# EAGLE board xkid_sensor_0.3 (EAGLE 7.1.0)
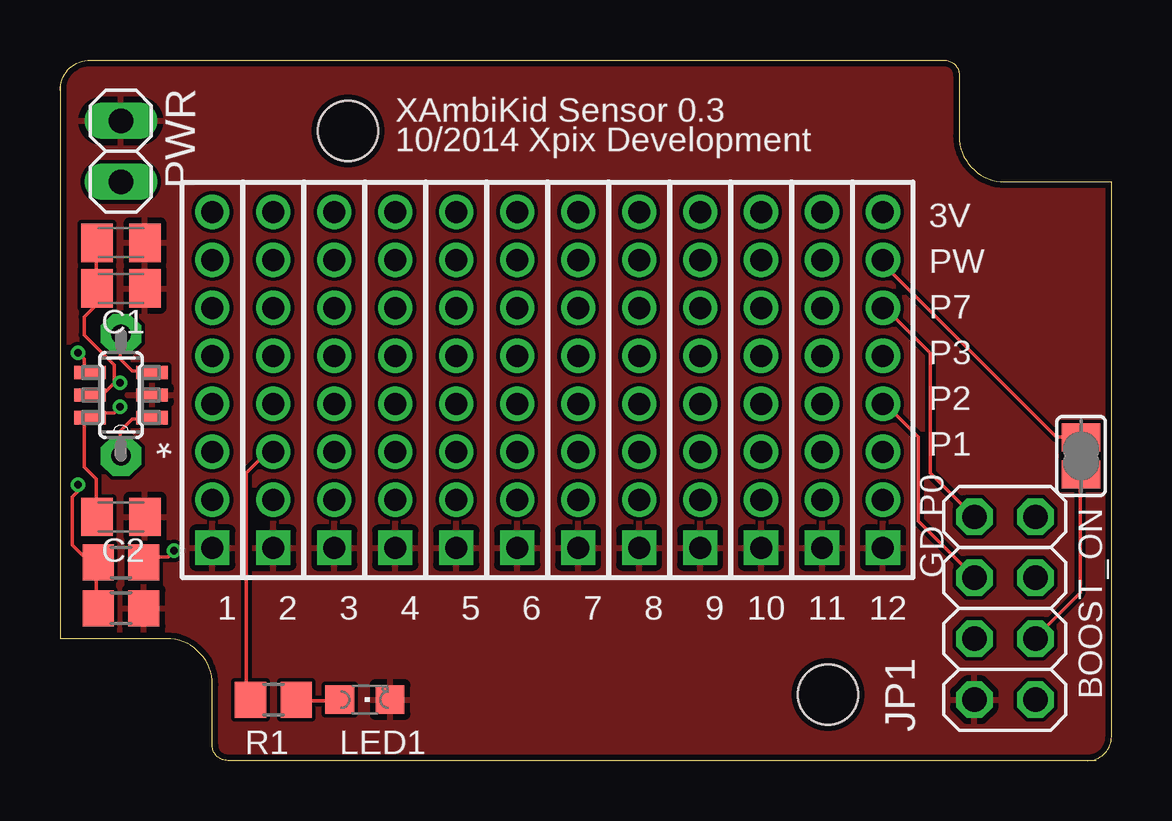
[diagram p0: board, top side]
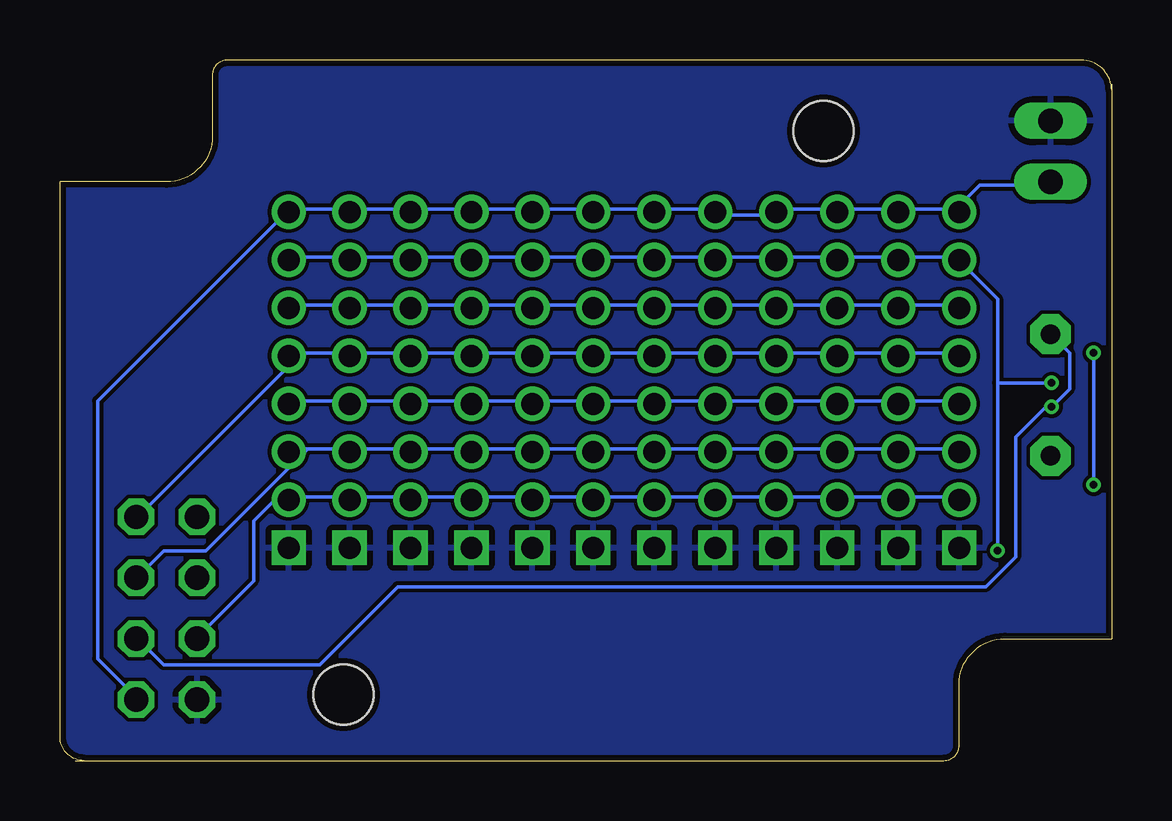
[diagram p1: board, bottom side, seen from below]

Size 43.81 x 29.21 mm. Coordinates in mm from the lower left corner, seen from the top.
Outline: 42.81,0 arc90 43.81,1 43.81,24.13 39.37,24.13 arc-90 37.47,26.04 37.47,28.57 arc90 36.83,29.21 1.27,29.21 arc90 0,27.94
Outline: 0,28.21 0,5.08 4.45,5.08 arc-90 6.35,3.17 6.35,0.64 arc90 6.99,0 43.18,0
Copper layers (1*16): Top 0.035mm / dielectric 1.5mm / Bottom 0.035mm
Design rules "ITEADstudio_DRC": minimum track width 6mil, minimum drill 12mil, track to track 6mil, track to pad 6mil, pad to pad 6mil, via to via 6mil, smd to smd 0mil, copper to edge 10mil, drill to drill 10mil, minimum pad ring 10mil, minimum via ring 6mil, stop-mask expansion 2mil, vias tented up to drill 100mil, thermal gap 10mil
Holes 2.5 mm at 32,2.75 12,26.25

## Footprints (pad centres in the part's own frame; a part is rotated, then mirrored left to right if it is on the bottom)
1X08M = drill 0.914 square: 1 -7,0 | drill 0.914: 2 -5,0; 3 -3,0; 4 -1,0; 5 1,0; 6 3,0; 7 5,0; 8 7,0
SOT95P270X145-6N = smd 1.321 x 0.559: 1 -1.295,0.94; 2 -1.295,0; 3 -1.295,-0.94; 4 1.295,-0.94; 5 1.295,0; 6 1.295,0.94
SJ = smd 1.168 x 1.6: 1 -0.762,0; 2 0.762,0
C0805K = smd 1.3 x 1.6: 1 -1,0; 2 1,0
2X04 = drill 1.016 octagon: 1 -3.81,-1.27; 2 -3.81,1.27; 3 -1.27,-1.27; 4 -1.27,1.27; 5 1.27,-1.27; 6 1.27,1.27; 7 3.81,-1.27; 8 3.81,1.27
0204/5 = drill 0.813 pad 1.676 octagon: 1 -2.54,0; 2 2.54,0
CHIPLED_0805 = smd 1.2 x 1.2: A 0,-1.05; C 0,1.05
1X02 = drill 1.016 long: 1 -1.27,0; 2 1.27,0
R0805 = smd 1.3 x 1.5: 1 -0.95,0; 2 0.95,0

## Placement (x,y rotation side)
1  [1X08M]  6.35,15.88 90 top
2  [1X08M]  8.89,15.88 90 top
3  [1X08M]  11.43,15.88 90 top
4  [1X08M]  13.97,15.88 90 top
5  [1X08M]  16.51,15.88 90 top
6  [1X08M]  19.05,15.88 90 top
7  [1X08M]  21.59,15.88 90 top
8  [1X08M]  24.13,15.88 90 top
9  [1X08M]  26.67,15.88 90 top
10  [1X08M]  29.21,15.88 90 top
11  [1X08M]  31.75,15.88 90 top
12  [1X08M]  34.29,15.88 90 top
BOOST  MCP1640  [SOT95P270X145-6N]  2.54,15.24 180 top
BOOST_ON  BoostOff?  [SJ]  42.55,12.7 270 top
C1  4.7mF  [C0805K]  2.54,19.68 180 top
C2  4.7mF  [C0805K]  2.54,10.16 180 top
C3  100nF  [C0805K]  2.54,21.59 180 top
JP1  [2X04]  39.37,6.35 270 top
L1  4.7mH  [0204/5]  2.54,15.24 90 top
LED1  [CHIPLED_0805]  12.7,2.54 270 top
PWR  [1X02]  2.54,25.4 270 top
R1  [R0805]  8.89,2.54 180 top
R2  330k  [R0805]  2.54,8.26 0 top
R3  200k  [R0805]  2.54,6.35 180 top

## Library data of the parts
1-12 JP1 PWR = pinhead
BOOST = xpix; MPN: MCP1640BT-I/CHY; OC_FARNELL: 1800207; OC_NEWARK: 73R3625; PACKAGE: SOT-6; SUPPLIER: Microchip
BOOST_ON = jumper
C1-C3 R1-R3 = rcl
L1 LED1 = _adafruit

## Nets
+3V3: 1.8 2.8 3.8 4.8 5.8 6.8 7.8 8.8 9.8 10.8 11.8 12.8 JP1.8 PWR.2
BAT+: BOOST.3 BOOST.6 BOOST_ON.2 C2.2 JP1.6 L1.2
GND: 1.1 2.1 3.1 4.1 5.1 6.1 7.1 8.1 9.1 10.1 11.1 12.1 BOOST.2 C1.1 C2.1 C3.1 JP1.7 LED1.C PWR.1 R3.1
N$1: LED1.A R1.1
N$2: BOOST.1 L1.1
N$4: BOOST.4 R2.1 R3.2
PA0: 1.2 2.2 3.2 4.2 5.2 6.2 7.2 8.2 9.2 10.2 11.2 12.2 JP1.5
PA1: 1.3 2.3 3.3 4.3 5.3 6.3 7.3 8.3 9.3 10.3 11.3 12.3 JP1.4 R1.2
PA2: 1.4 2.4 3.4 4.4 5.4 6.4 7.4 8.4 9.4 10.4 11.4 12.4 JP1.3
PA3: 1.5 2.5 3.5 4.5 5.5 6.5 7.5 8.5 9.5 10.5 11.5 12.5 JP1.2
PA7: 1.6 2.6 3.6 4.6 5.6 6.6 7.6 8.6 9.6 10.6 11.6 12.6 JP1.1
PW_RFM: 1.7 2.7 3.7 4.7 5.7 6.7 7.7 8.7 9.7 10.7 11.7 12.7 BOOST.5 BOOST_ON.1 C1.2 C3.2 R2.2

## Tracks (layer width: path | path; a pad name or v marks a point on that pad's centre or on a via)
+3V3
  Bottom 0.152: 6.5,23 8.75,23 2.8 9,23 11.25,23 3.8 11.5,23 13.75,23 4.8 14,22.75 16.5,22.75 5.8 16.75,23 19,23 6.8 19.25,23 21.5,23 7.8 21.75,23 24,23 8.8 24.25,23 26.5,23 9.8 26.75,23 29,23 10.8 29.25,23 31.75,23 | 6.5,23 5.5,24 2.75,24 PWR.2 | 6.5,23 1.8 | 31.75,23 34.25,23 12.8 34.5,22.75 42.25,15 42.25,4.25 40.75,2.75 JP1.8 | 31.75,23 11.8
BAT+  (via drill 0.3)
  Top 0.152: BOOST_ON.2 42.5,11.75 42.5,7 40.75,5.25 JP1.6 | C2.2 1.5,10.25 1.5,11.75 1,12.25 1,14.25 BOOST.6 1.25,14.5 2.25,14.5 v2.5,14.75 | BOOST.3 3.75,16.25 3,16.25 2.5,16.75 2.5,17.75 L1.2
  Bottom 0.152: L1.2 2.5,17.75 1.75,17 1.75,15.5 v2.5,14.75 2.75,14.75 4,13.5 4,8.5 5.25,7.25 29.75,7.25 33,4 39.5,4 40.5,5 JP1.6
GND
  pour Bottom: 0,0 0,29.21 44.45,29.21 44.45,0
  pour Top: 0,0 0,29.21 44.45,29.21 44.45,0
N$1
  Top 0.152: LED1.A 11.5,2.5 10,2.5 R1.1
N$2
  Top 0.152: BOOST.1 3.75,14.25 3,14.25 2.5,13.75 2.5,12.75 L1.1
N$4  (via drill 0.3)
  Top 0.152: v0.75,17 1,16.75 1,16.25 BOOST.4 | v0.75,11.5 0.75,11.25 0.5,11 0.5,9 1,8.5 1.5,8.5 R2.1 1.5,8.25 1.5,6.5 R3.2
  Bottom 0.152: v0.75,11.5 v0.75,17
PA0
  Bottom 0.152: 1.2 6.5,11 8.75,11 2.2 9,11 11.25,11 3.2 11.5,11 13.75,11 4.2 14,11 16.5,11 5.2 16.75,11 19,11 6.2 19.25,11 21.5,11 7.2 21.75,11 24,11 8.2 24.25,11 26.5,11 9.2 26.75,11 29,11 10.2 29.25,11 31.75,11 | 31.75,11 34.25,11 12.2 34.5,10.75 35,10.75 35.75,10 35.75,7.5 38,5.25 JP1.5 | 31.75,11 11.2
PA1
  Top 0.152: R1.2 7.75,2.75 7.75,12 8.75,13 2.3
  Bottom 0.152: 1.3 6.5,13 8.75,13 2.3 9,13 11.25,13 3.3 11.5,13 13.75,13 4.3 14,13 16.5,13 5.3 16.75,13 19,13 6.3 19.25,13 21.5,13 7.3 21.75,13 24,13 8.3 24.25,13 26.5,13 9.3 26.75,13 29,13 10.3 29.25,13 31.75,13 | 31.75,13 33.5,13 | 33.5,13 34.25,13 12.3 | 31.75,13 11.3 | 33.5,13 37.75,8.75 39.5,8.75 40.5,7.75 JP1.4
PA2
  Top 0.152: JP1.3 38,7.75 35.75,10 35.75,13.5 34.5,14.75 12.4
  Bottom 0.152: 1.4 6.5,15 8.75,15 2.4 9,15 11.25,15 3.4 11.5,15 13.75,15 4.4 14,15 16.5,15 5.4 16.75,15 19,15 6.4 19.25,15 21.5,15 7.4 21.75,15 24,15 8.4 24.25,15 26.5,15 9.4 26.75,15 29,15 10.4 29.25,15 31.75,15 | 31.75,15 34.25,15 12.4 | 31.75,15 11.4
PA3
  Bottom 0.152: 1.5 6.5,17 8.75,17 2.5 9,17 11.25,17 3.5 11.5,17 13.75,17 4.5 14,17 16.5,17 5.5 16.75,17 19,17 6.5 19.25,17 21.5,17 7.5 21.75,17 24,17 8.5 24.25,17 26.5,17 9.5 26.75,17 29,17 10.5 29.25,17 31.75,17 | 31.75,17 33.75,17 | 33.75,17 34.25,17 12.5 33.75,17 | 31.75,17 11.5 | 33.75,17 40.5,10.25 JP1.2
PA7
  Top 0.152: JP1.1 38,10.25 36.25,12 36.25,17 34.5,18.75 12.6
  Bottom 0.152: 1.6 6.5,19 8.75,19 2.6 9,19 11.25,19 3.6 11.5,19 13.75,19 4.6 14,19 16.5,19 5.6 16.75,19 19,19 6.6 19.25,19 21.5,19 7.6 21.75,19 24,19 8.6 24.25,19 26.5,19 9.6 26.75,19 29,19 10.6 29.25,19 31.75,19 | 31.75,19 34.25,19 12.6 | 31.75,19 11.6
PW_RFM  (via drill 0.3)
  Top 0.152: 2.25,15.75 1.75,15.25 BOOST.5 | 2.25,15.75 2.25,16.5 1,17.75 1,18.5 1.5,19 1.5,19.5 C1.2 1.5,19.75 1.5,21.5 C3.2 | v4.75,8.75 4.5,8.5 3.5,8.5 R2.2 | v2.5,15.75 2.25,15.75 | BOOST_ON.1 42.5,13.5 41.5,13.5 34.25,20.75 12.7
  Bottom 0.152: 4.75,15.75 4.75,19.25 6.25,20.75 1.7 6.5,21 8.75,21 2.7 9,21 11.25,21 3.7 11.5,21 13.75,21 4.7 14,21 16.5,21 5.7 16.75,21 19,21 6.7 19.25,21 21.5,21 7.7 21.75,21 24,21 8.7 24.25,21 26.5,21 9.7 26.75,21 29,21 10.7 29.25,21 31.75,21 | 4.75,15.75 v4.75,8.75 | 4.75,15.75 v2.5,15.75 | 31.75,21 34.25,21 12.7 | 31.75,21 11.7

## Text on the board
tNames: XAmbiKid Sensor 0.3 / 10/2014 Xpix Development | 3V | PW | P7 | P3 | P2 | P1 | P0 | GD